# EAGLE board pcb_smd_4 (EAGLE 9.3.0)
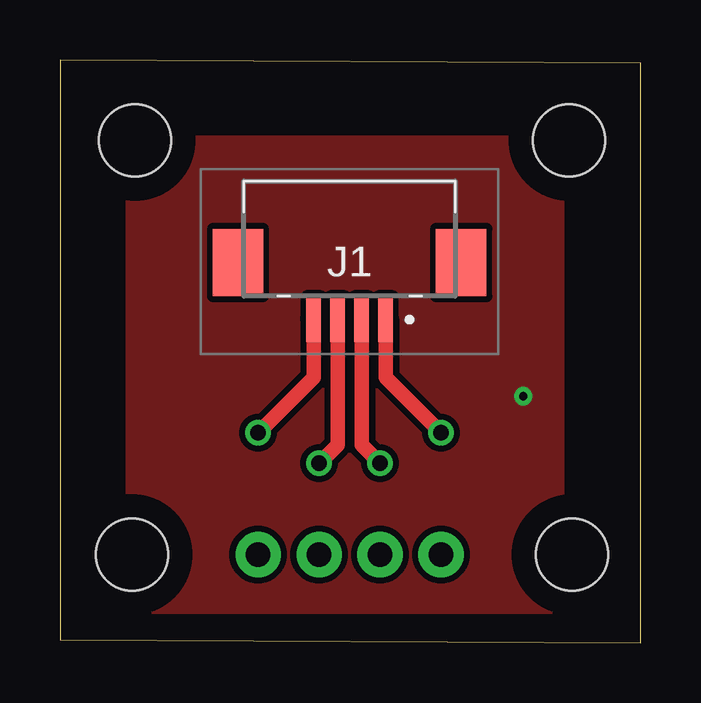
[diagram p0: board, top side]
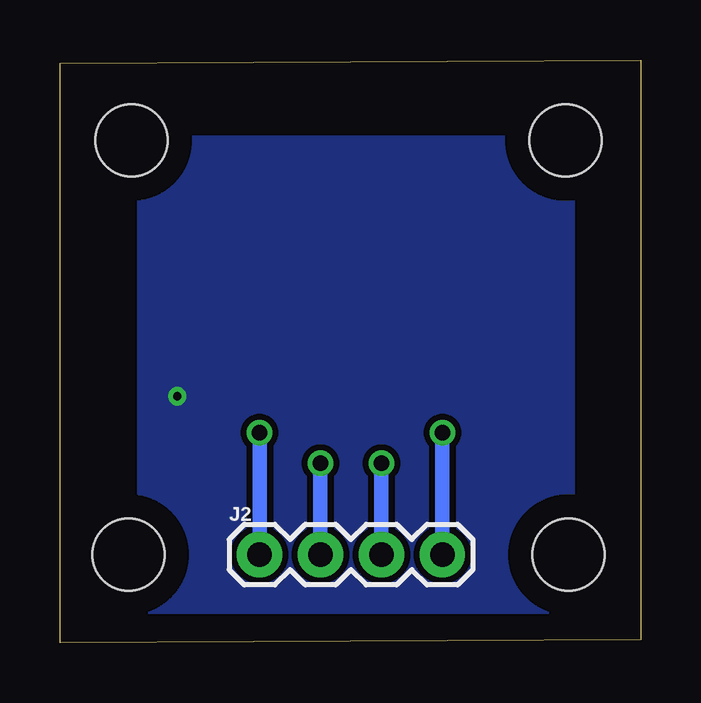
[diagram p1: board, bottom side, seen from below]

Size 24.19 x 24.31 mm. Coordinates in mm from the lower left corner, seen from the top.
Outline: 0,0.13 24.19,0 24.19,24.18 0,24.31 0,0.13
Copper layers (1*16): Top 0.035mm / dielectric 1.5mm / Bottom 0.035mm
Design rules "default": minimum track width 6mil, minimum drill 0.35mm, track to track 6mil, track to pad 6mil, pad to pad 6mil, via to via 6mil, smd to smd 6mil, copper to edge 40mil, drill to drill 6mil, minimum pad ring 10mil, minimum via ring 8mil, stop-mask expansion 4mil, vias tented up to drill 0mil, thermal gap 10mil
Net classes: 0 default: clearance 0.254 mm
Holes 3 mm at 3.13,20.96 21.21,20.96 3,3.68 21.34,3.68

## Footprints (pad centres in the part's own frame; a part is rotated, then mirrored left to right if it is on the bottom)
527930472 = smd 0.6 x 1.9: 1 -1.5,2.875; 2 -0.5,2.875; 3 0.5,2.875; 4 1.5,2.875 | smd 2.1 x 2.8: MP1 -4.65,0.525; MP2 4.65,0.525
1X04 = drill 1.016 pad 1.88: 1 0,0; 2 2.54,0; 3 5.08,0; 4 7.62,0

## Placement (x,y rotation side)
J1  52793-0470  [527930472]  12.06,16.38 180 top
J2  [1X04]  15.88,3.68 0 bottom

## Library data of the parts
J1 = 52793-0470; ALLIED_NUMBER: 71463721; ALLIED_PRICE-STOCK: https://www.alliedelec.com/molexincorporated-52793-0470/71463721/; DESCRIPTION: Molex 52793 Series 1mm Pitch 4 Way SMT Female FPC Connector, Non-ZIF; HEIGHT: 3.1mm; MANUFACTURER_NAME: Molex; MANUFACTURER_PART_NUMBER: 52793-0470; MOUSER_PART_NUMBER: 538-52793-0470; MOUSER_PRICE-STOCK: https://www.mouser.com/Search/Refine.aspx?Keyword=538-52793-0470; RS_PART_NUMBER: 1791963; RS_PRICE-STOCK: http://uk.rs-online.com/web/p/products/1791963
J2 = SparkFun-Connectors; PROD_ID: CONN-09696

## Nets
N$1: J1.2 J2.2
N$2: J1.3 J2.3
N$3: J1.4 J2.4
N$5: J1.1 J2.1

## Tracks (layer width: path | path; a pad name or v marks a point on that pad's centre or on a via)
GND  (via drill 0.35)
  other vias: 19.3,10.29
  pour Top: 2.79,21.08 20.95,21.08 20.95,1.27 2.79,1.27
  pour Bottom: 2.79,21.08 20.91,21.08 20.91,1.27 2.79,1.27
N$1  (via drill 0.65)
  Top 0.61: J1.2 12.56,8.26 v13.34,7.49
  Bottom 0.61: v13.34,7.49 J2.2
N$2  (via drill 0.65)
  Top 0.61: J1.3 11.56,8.26 v10.79,7.49
  Bottom 0.61: v10.79,7.49 J2.3
N$3  (via drill 0.65)
  Top 0.61: J1.4 10.56,11.07 v8.26,8.76
  Bottom 0.61: v8.26,8.76 J2.4
N$5  (via drill 0.65)
  Top 0.61: J1.1 13.56,11.07 v15.88,8.76
  Bottom 0.61: v15.88,8.76 J2.1